# EAGLE board Buck_Converter_Prototype_Board_5V_3A_LM2596S (EAGLE 9.2.2)
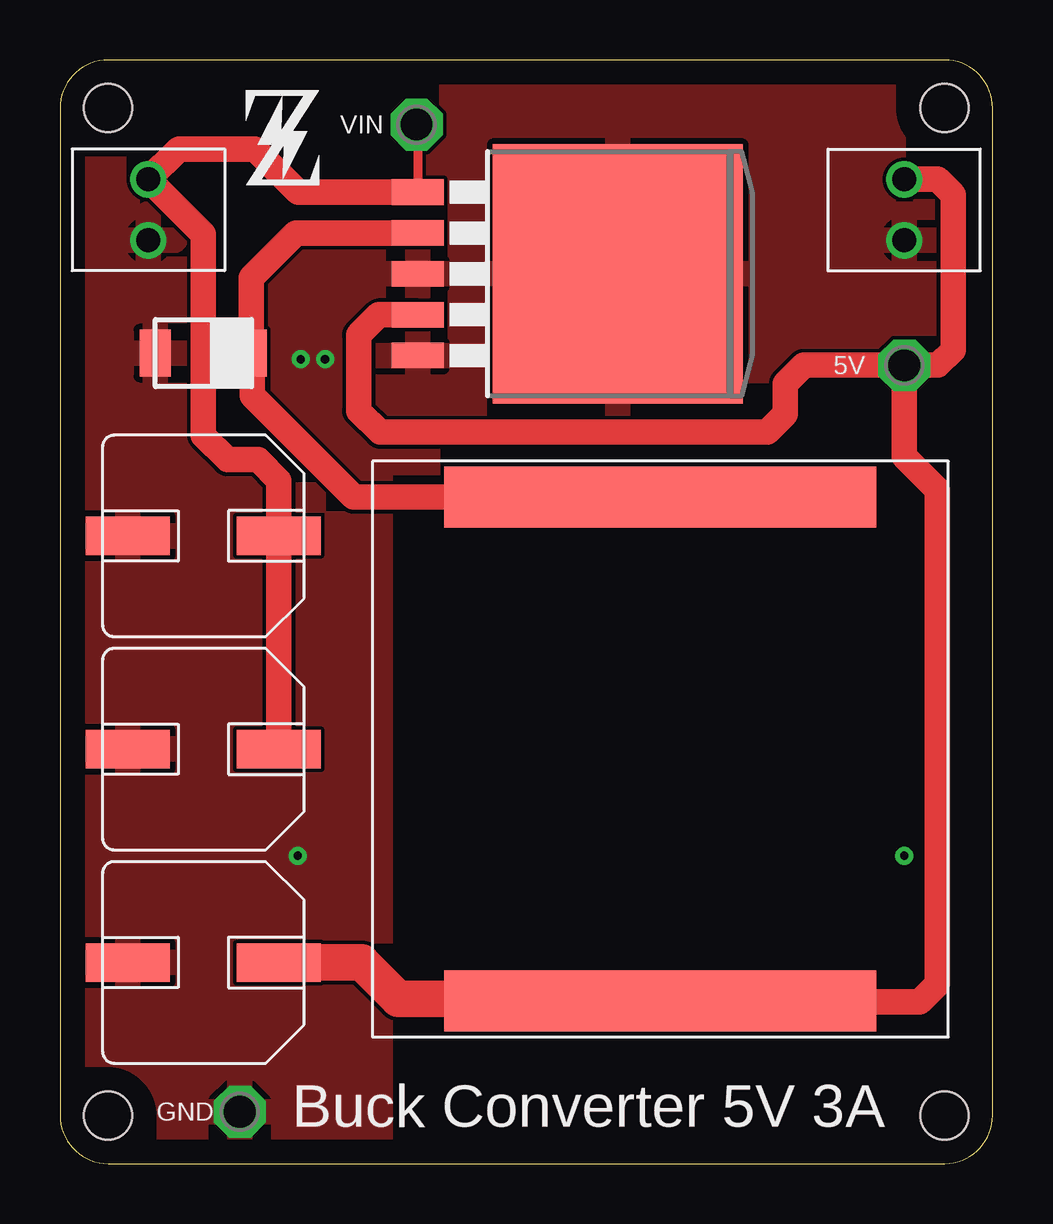
[diagram p0: board, top side]
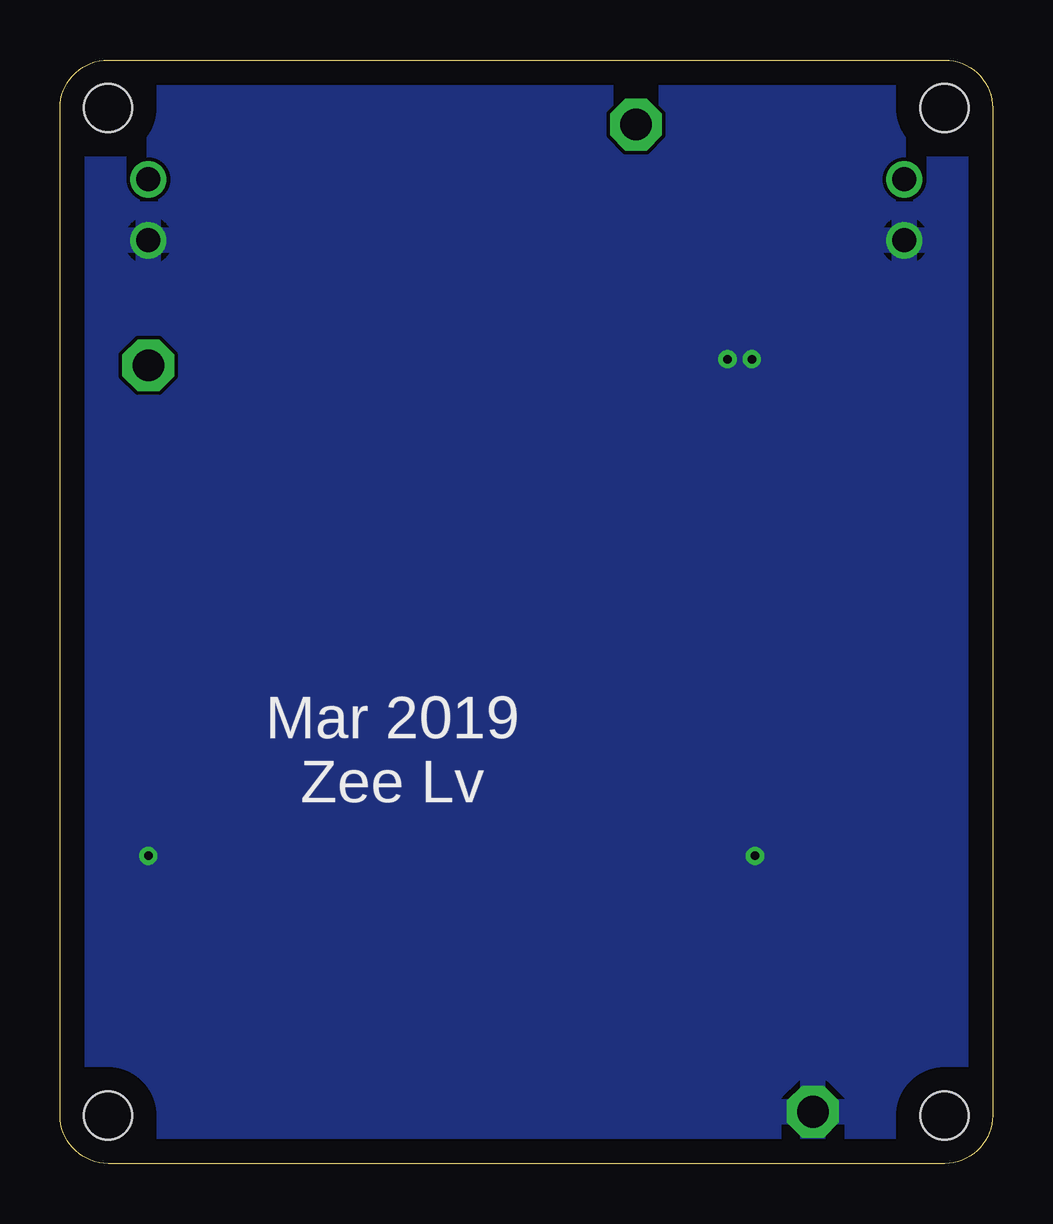
[diagram p1: board, bottom side, seen from below]

Size 38.86 x 46 mm. Coordinates in mm from the lower left corner, seen from the top.
Outline: 0,44 0,2 arc90 2,0 36.86,0 arc90 38.86,2 38.86,44 arc90 36.86,46 2,46 arc90 0,44
Copper layers (1*16): Top 0.035mm / dielectric 1.5mm / Bottom 0.035mm
Design rules "default": minimum track width 6mil, minimum drill 0.35mm, track to track 6mil, track to pad 6mil, pad to pad 6mil, via to via 6mil, smd to smd 6mil, copper to edge 40mil, drill to drill 6mil, minimum pad ring 10mil, minimum via ring 8mil, stop-mask expansion 4mil, vias tented up to drill 0mil, thermal gap 10mil
Holes 2 mm at 2,2 36.86,2 36.86,44 2,44

## Footprints (pad centres in the part's own frame; a part is rotated, then mirrored left to right if it is on the bottom)
P1-13 = drill 1.321 pad 2.159 octagon: TP 0,0
_CAPACITOR_CHEMI-CON_A_HA0_SMD = smd 3.5 x 1.6: + -3.15,0; - 3.15,0
_PACKAGE_TO263-5 = smd 1.067 x 2.159: 1 -3.404,-5.791; 2 -1.702,-5.791; 3 0,-5.791; 4 1.702,-5.791; 5 3.404,-5.791 | smd 10.8 x 10.41: 6 0,2.54
_TERMINAL_BLOCK_2.54_1X2 = drill 1: 1 -1.27,0; 2 1.27,0
_PACKAGE_HCI-68 = smd 18 x 2.54: 1 0,-10.5; 2 0,10.5
_PACKAGE_SOD128 = smd 1.3 x 1.95: A -2,0; C 2,0

## Placement (x,y rotation side)
5V  TPPAD1-13  [P1-13]  35.18,33.27 0 top
C1  330uF, 35V  [_CAPACITOR_CHEMI-CON_A_HA0_SMD]  5.97,26.16 180 top
C2  330uF, 35V  [_CAPACITOR_CHEMI-CON_A_HA0_SMD]  5.97,17.27 180 top
C4  330uF, 35V  [_CAPACITOR_CHEMI-CON_A_HA0_SMD]  5.97,8.38 180 top
GND  TPPAD1-13  [P1-13]  7.49,2.16 0 top
IC1  [_PACKAGE_TO263-5]  20.7,37.08 270 top
U$1  POWER_CONNECTOR  [_TERMINAL_BLOCK_2.54_1X2]  35.18,39.75 90 top
U$2  [__LOGO_Z]  7.75,40.77 0 top
U$22  POWER_CONNECTOR  [_TERMINAL_BLOCK_2.54_1X2]  3.68,39.75 270 top
U$23  _INDUCTOR_PE-54040SNL  [_PACKAGE_HCI-68]  25.02,17.27 180 top
U$24  _DIODE_SOD128  [_PACKAGE_SOD128]  5.97,33.78 0 top
VIN  TPPAD1-13  [P1-13]  14.86,43.31 0 top

## Library data of the parts
5V GND VIN = testpad
C1 C2 C4 IC1 U$1 U$2 U$22-U$24 = Z

## Nets
5V: 5V.TP C4.+ IC1.4 U$1.2 U$23.2
GND: C1.- C2.- C4.- GND.TP IC1.3 IC1.5 IC1.6 U$1.1 U$22.2 U$24.A
N$11: IC1.2 U$23.1 U$24.C
VIN: C1.+ C2.+ IC1.1 U$22.1 VIN.TP

## Tracks (layer width: path | path; a pad name or v marks a point on that pad's centre or on a via)
5V
  Top 1.067: IC1.4 13.28,35.38 12.45,34.54 12.45,31.37 13.34,30.48 29.46,30.48 30.23,31.24 30.23,32.51 30.99,33.27 5V.TP | 5V.TP 35.18,29.46 36.55,28.09 36.55,7.47 35.81,6.73 25.06,6.73 U$23.2 | 5V.TP 36.58,33.27 37.21,33.91 37.21,40.39 36.58,41.02 U$1.2
  Top 1.524: C4.+ 12.57,8.38 14.1,6.86 24.93,6.86 U$23.2
GND  (via drill 0.35)
  other vias: 10.03,33.53 35.18,12.83 9.91,12.83 11.05,33.53
  pour Bottom: 0,44 0,2 arc90 2,0 37,0 arc90 39,2 39,44 arc90 37,46 2,46 arc90
  pour Top: 38.99,29.21 38.99,43.97 arc90 36.99,45.97 2,45.97 arc90 0,43.97 0,2 arc90 2,0 13.34,0 13.34,29.21
N$11
  Top 1.067: IC1.2 9.83,38.79 7.97,36.92 U$24.C 8,33.75 8,32 12.23,27.77 U$23.1
VIN
  Top 0.381: VIN.TP 14.91,43.26 IC1.1
  Top 1.067: C2.+ C1.+ 9.12,28.47 8.26,29.34 6.99,29.34 5.97,30.35 5.97,38.73 U$22.1 4.95,42.29 8.13,42.29 9.93,40.49 IC1.1

## Text on the board
tNames: Buck Converter 5V 3A
bNames: Mar 2019 / Zee Lv